# Altium PCB OR.PcbDoc
Units mm, origin at the board's own origin, x right, y up, seen from the top; angles counter-clockwise.
Board outline 35.94 x 31.24 mm, 2 copper layers (Top Layer, Bottom Layer); 5 components, 4 nets, 14 pads, 0 vias.
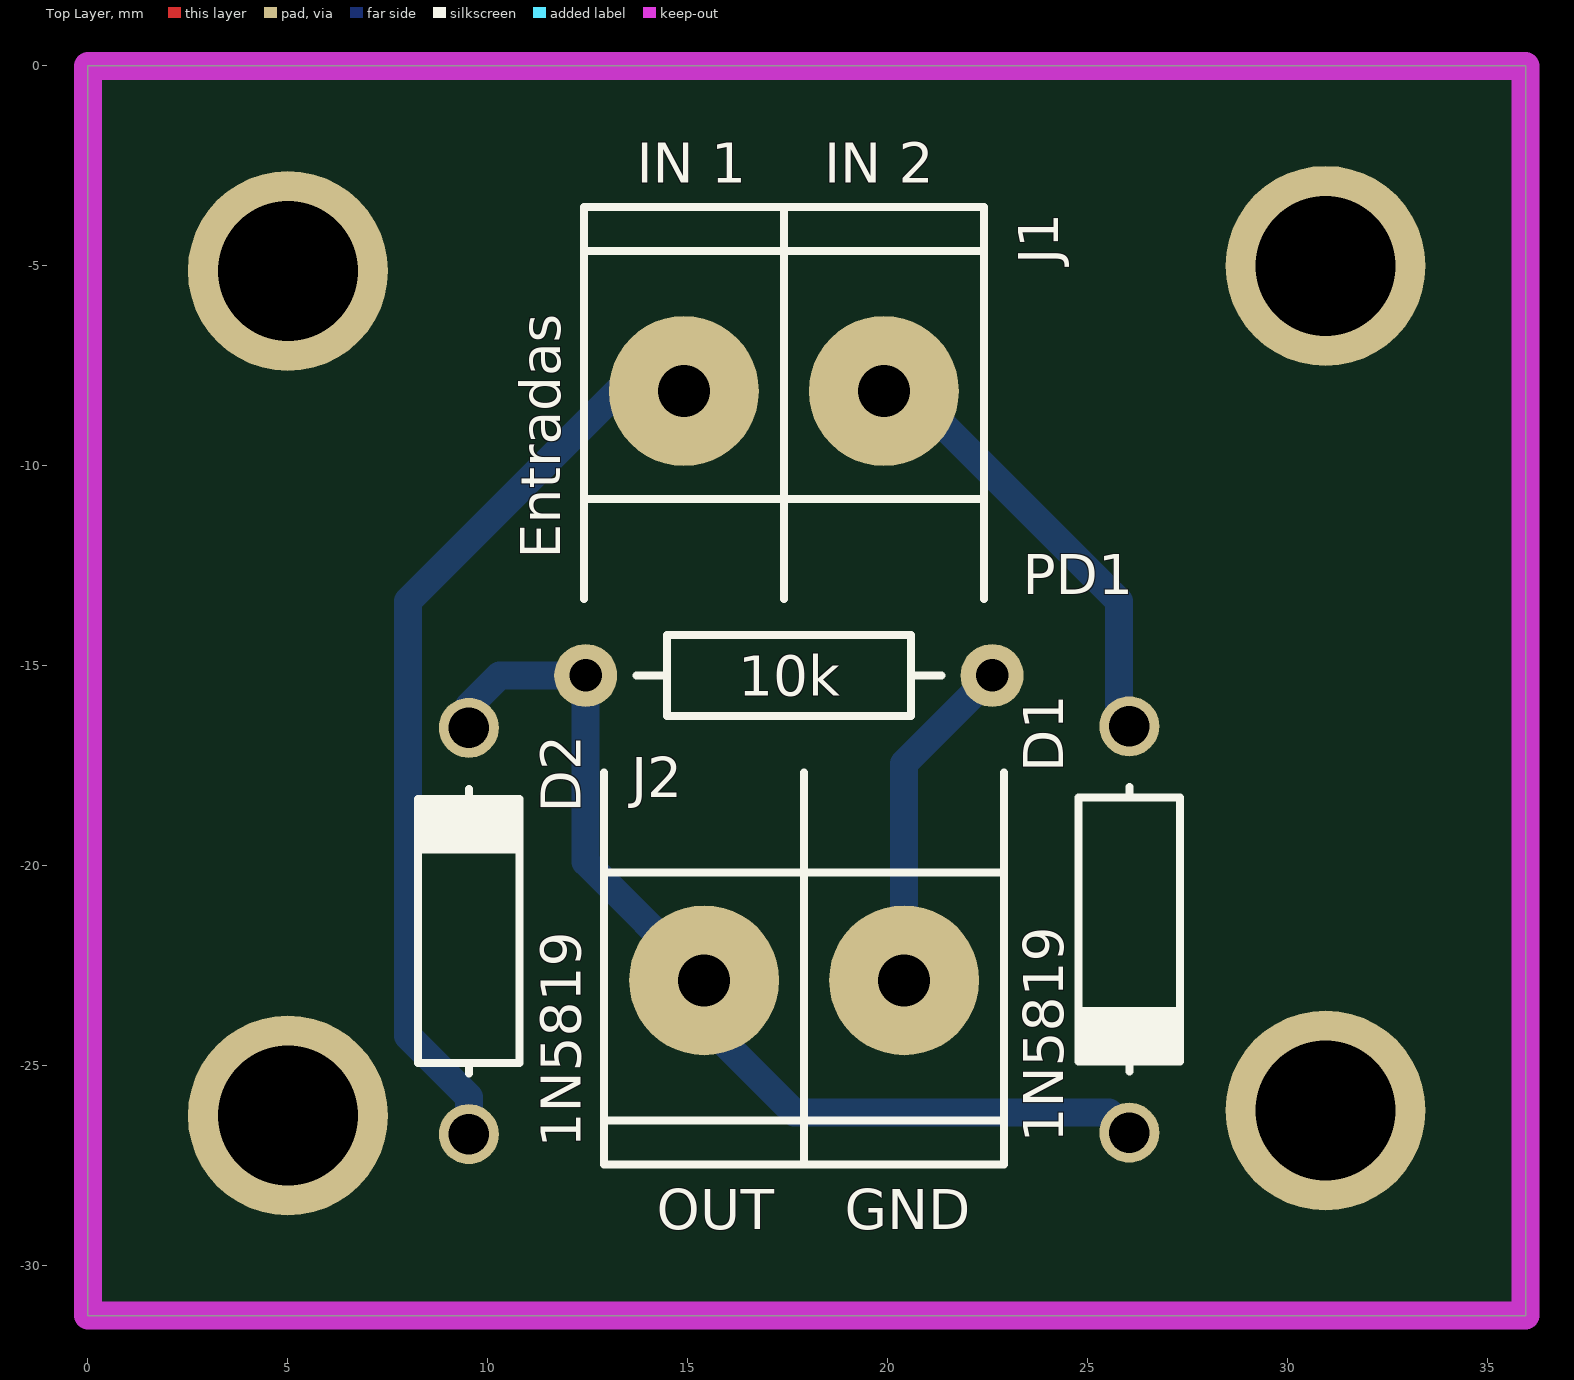
[diagram p0: Top Layer view]
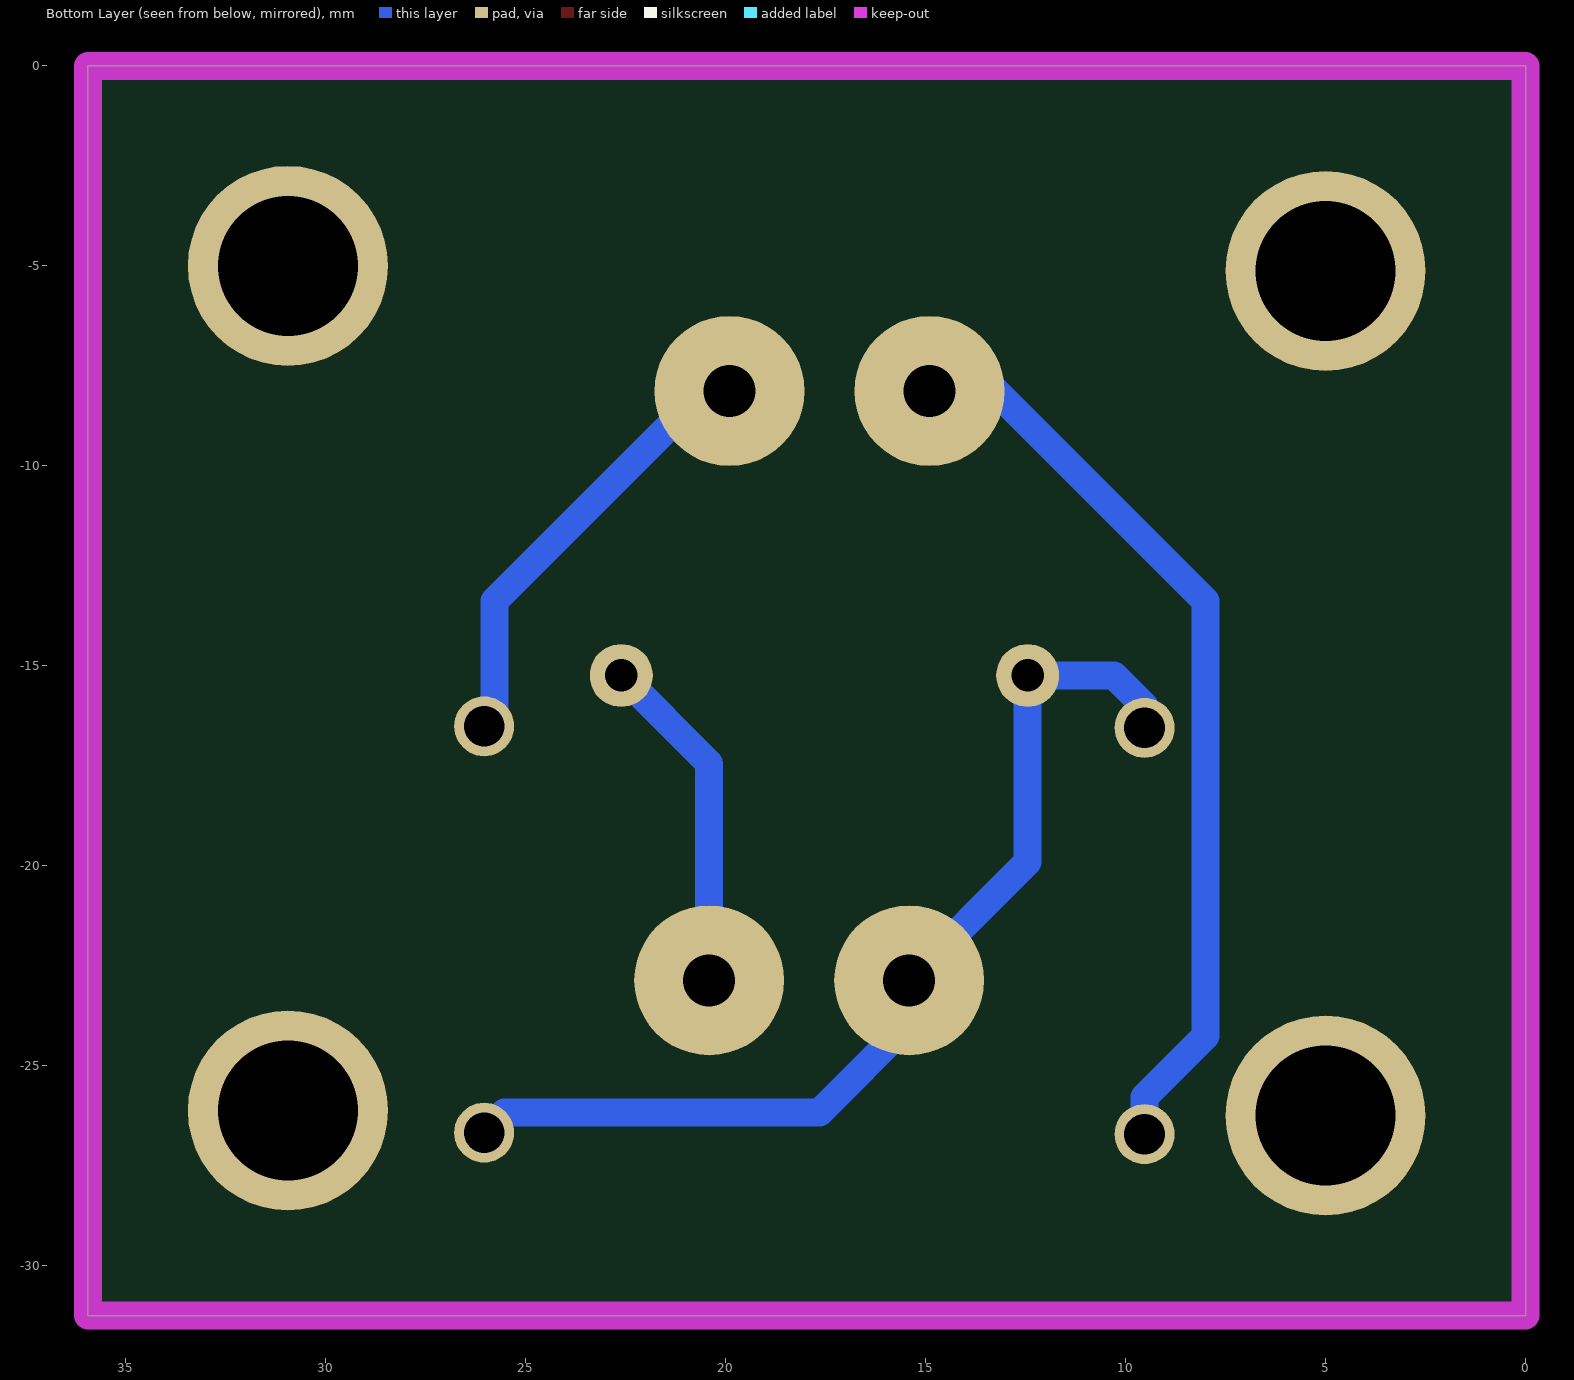
[diagram p1: Bottom Layer view, seen from below]
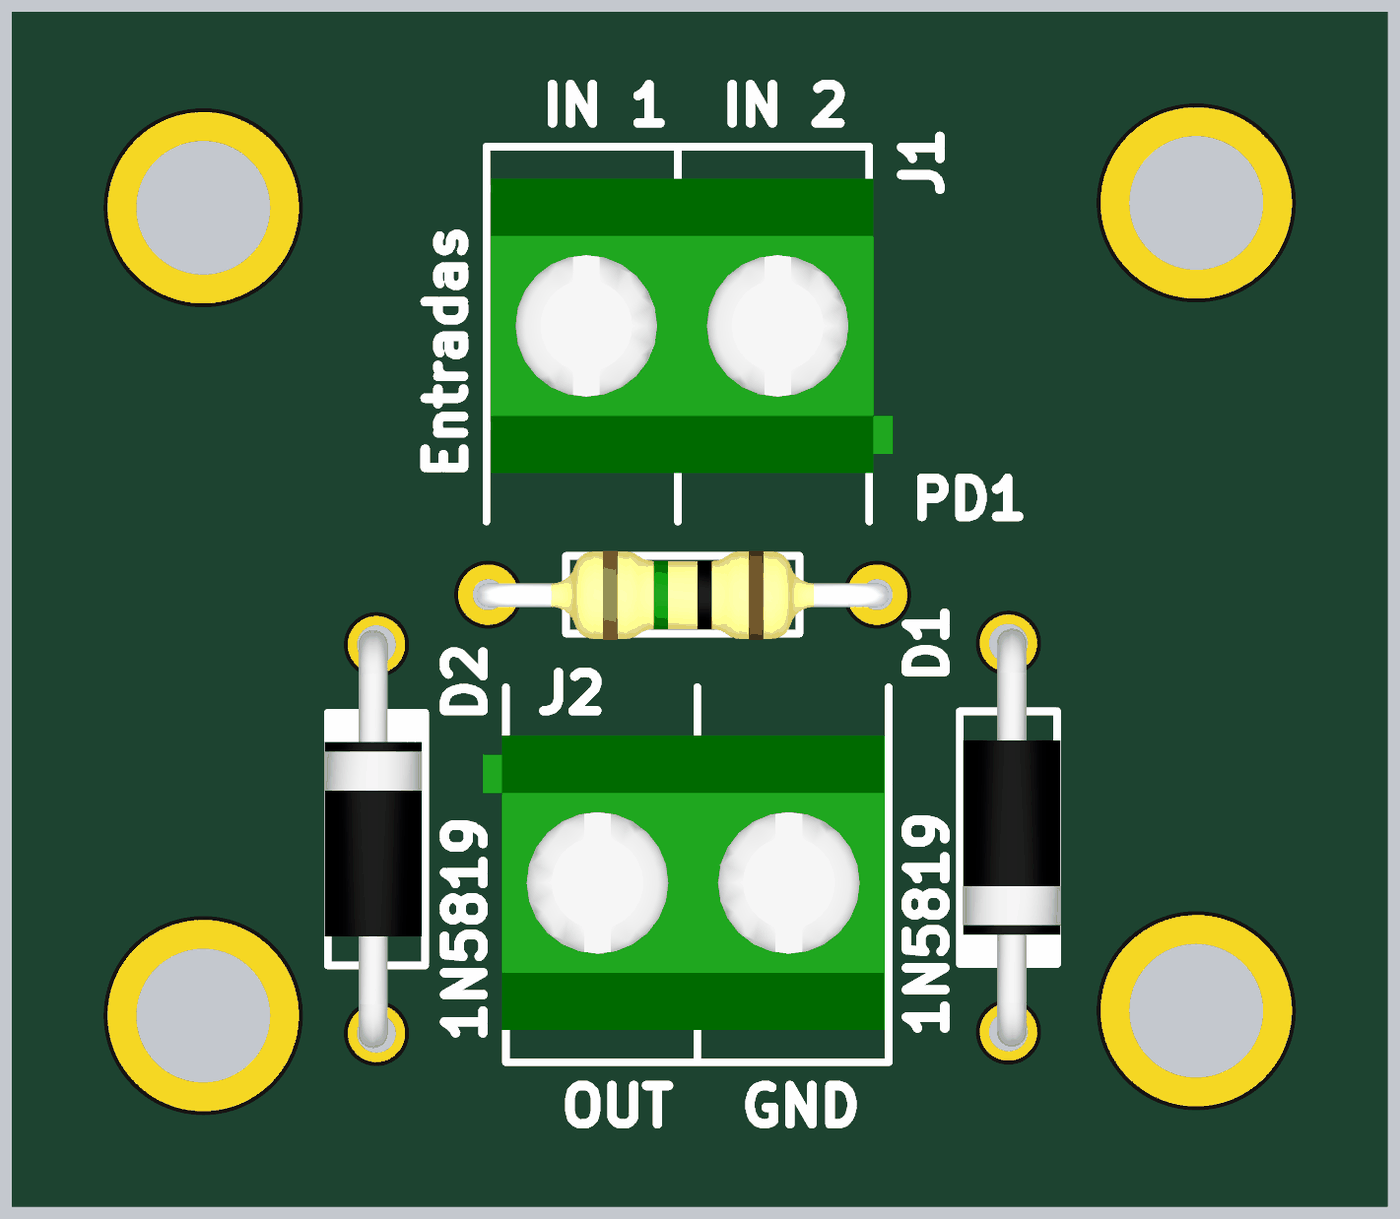
[diagram p2: 3D render of the assembled board from above, using the file's embedded part models]

## Layer stack, top to bottom
Top Layer: signal copper 0.0356
Dielectric: dielectric 0.32, FR-4, Dk 4.8
Bottom Layer: signal copper 0.0356

## Board outline
0,-31.242 35.941,-31.242 35.941,0 0,0

## Design rules (kind name [scope] priority, off if disabled: settings)
Clearance [All] p1: gap=0.3
PolygonConnect [All] p1: connectstyle=Relief reliefconductorwidth=0.254 reliefentries=4 polygonreliefangle="90 Angle"
RoutingVias [All] p1: holewidth=0.711 width=1.27 viastyle="Through Hole" minholewidth=0.711 minwidth=1.27 maxholewidth=0.711 maxwidth=1.27
SilkscreenOverComponentPads SilkToSolderMaskClearance [IsPad] p1: minsilkscreentomaskgap=0.254
SolderMaskExpansion [All] p1: expansion=0.102
Width [All] p1: maxlimit=0.7 minlimit=0.7 preferedwidth=0.7
27 further rules are at their usual default settings.

## Components (designator, comment, footprint, x,y, rotation, side; value= is the part's Value field where it differs from the comment)
D1 "1N5819" DO41 26.035,-21.59 r270 top
D2 "1N5819" DO41 9.525,-21.628 r90 top
J1 "Entradas" BORNERA2 17.4,-8.128 r270 top
J2 "OUT" BORNERA2 17.907,-22.86 r90 top
PD1 "10k" RES400 22.606,-15.24 r180 top

## Footprints (in the part's own frame and the unit in brackets; to place one, negate y for a bottom-side part, rotate by r counter-clockwise, add the part's x,y. Pads: shape width x height; smd on the part's side, far side on the other; paste and mask are expansions set on the pad)
BORNERA2 [mm] "Bornera con Tornillos 5mm separación"
  round 3.75 hole 1.3: 1(0,2.5) 2(0,-2.5)
  silkscreen extent -4.6,-5 5.2,5, body extent -3.76,-4.89 3.94,5.61, height 10
DO41 [mm]
  round 1.5 hole 1.016: 1(-5.08,0) 2(5.08,0)
  silkscreen extent -3.56,-1.27 3.56,1.27, body extent -5.46,-1.19 5.46,1.37, height 2.03
RES400 [mil]
  round 62 hole 32: 1(0,0) 2(400,0)
  silkscreen extent 50,-40 350,40, body extent -12,-45 412,46, height 96

## Part data
D1 D2: library part DIODO
J1 J2: library part "BORNERA 2"
PD1: library part RES

## Free pads (board coordinates)
  round 5 hole 3.5: 2(5,-26.242) 2(5,-5.127) 2(30.941,-26.115) 2(30.941,-5)

## Nets (pads, with @x,y where several pads share a name; then routed paths per layer and width w, separated by ;. In a path a pad name is that pad's centre, name@x,y a point inside that pad or via, vN(x,y) a via of type N, cw(c..) or ccw(c..) an arc to the next point about the centre after c; other vN are vias at no path point)
GND: J2.2 PD1.1 | length 8.5
  Bottom Layer w0.7: J2.2 20.407,-17.439 PD1.1
NetD1_1: D1.1 J1.1 | length 12.2
  Bottom Layer w0.7: J1.1@19.391,-6.985 25.781,-13.375 D1.1@25.781,-16.548
NetD1_2: D1.2 D2.2 J2.1 PD1.2 | length 24.9
  Bottom Layer w0.7: D2.2@9.525,-16.002 10.287,-15.24 PD1.2 12.446,-19.899 J2.1 15.407,-23.916 17.653,-26.162 25.527,-26.162 D1.2
NetD2_1: D2.1 J1.2 | length 22.5
  Bottom Layer w0.7: D2.1@9.525,-26.162 9.525,-25.781 8.001,-24.257 8.001,-13.375 J1.2@14.391,-6.985

## Keep-outs
Keep-Out Layer:
  the board outline again, w0.7

## Silkscreen, mask and mechanical layers (free items; w line width, h text height)
Top Overlay:
  text "IN 1" at 13.716,-2.921 h1
  text "IN 2" at 18.415,-2.921 h1
  text "GND" at 18.923,-29.083 h1